# EAGLE board PCB-board-v1.1 (EAGLE 9.2.0)
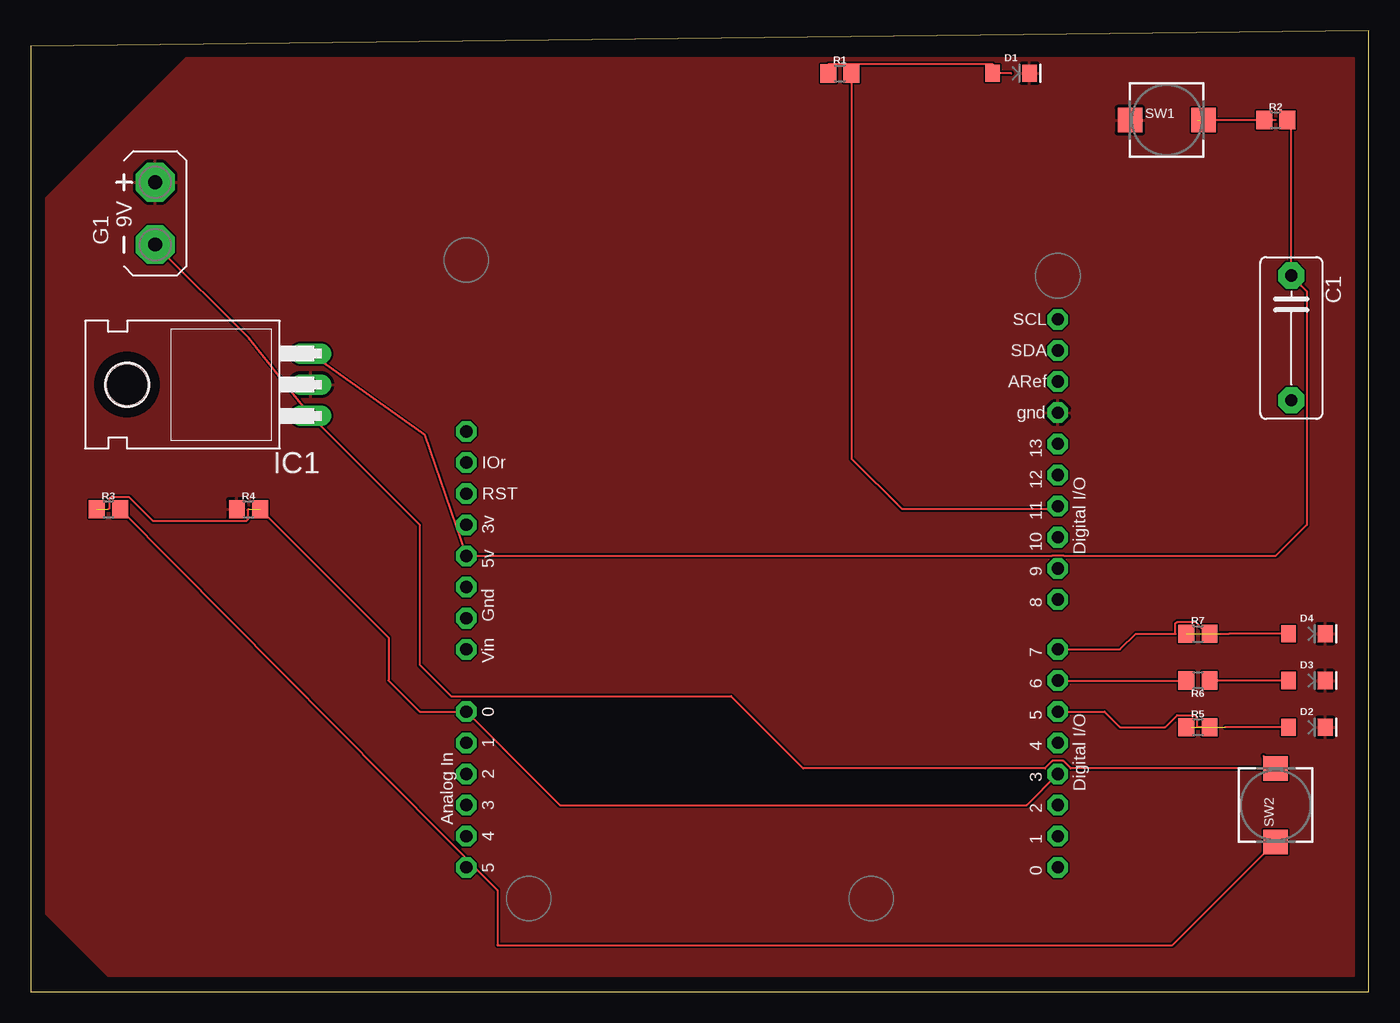
[diagram p0: board, top side]
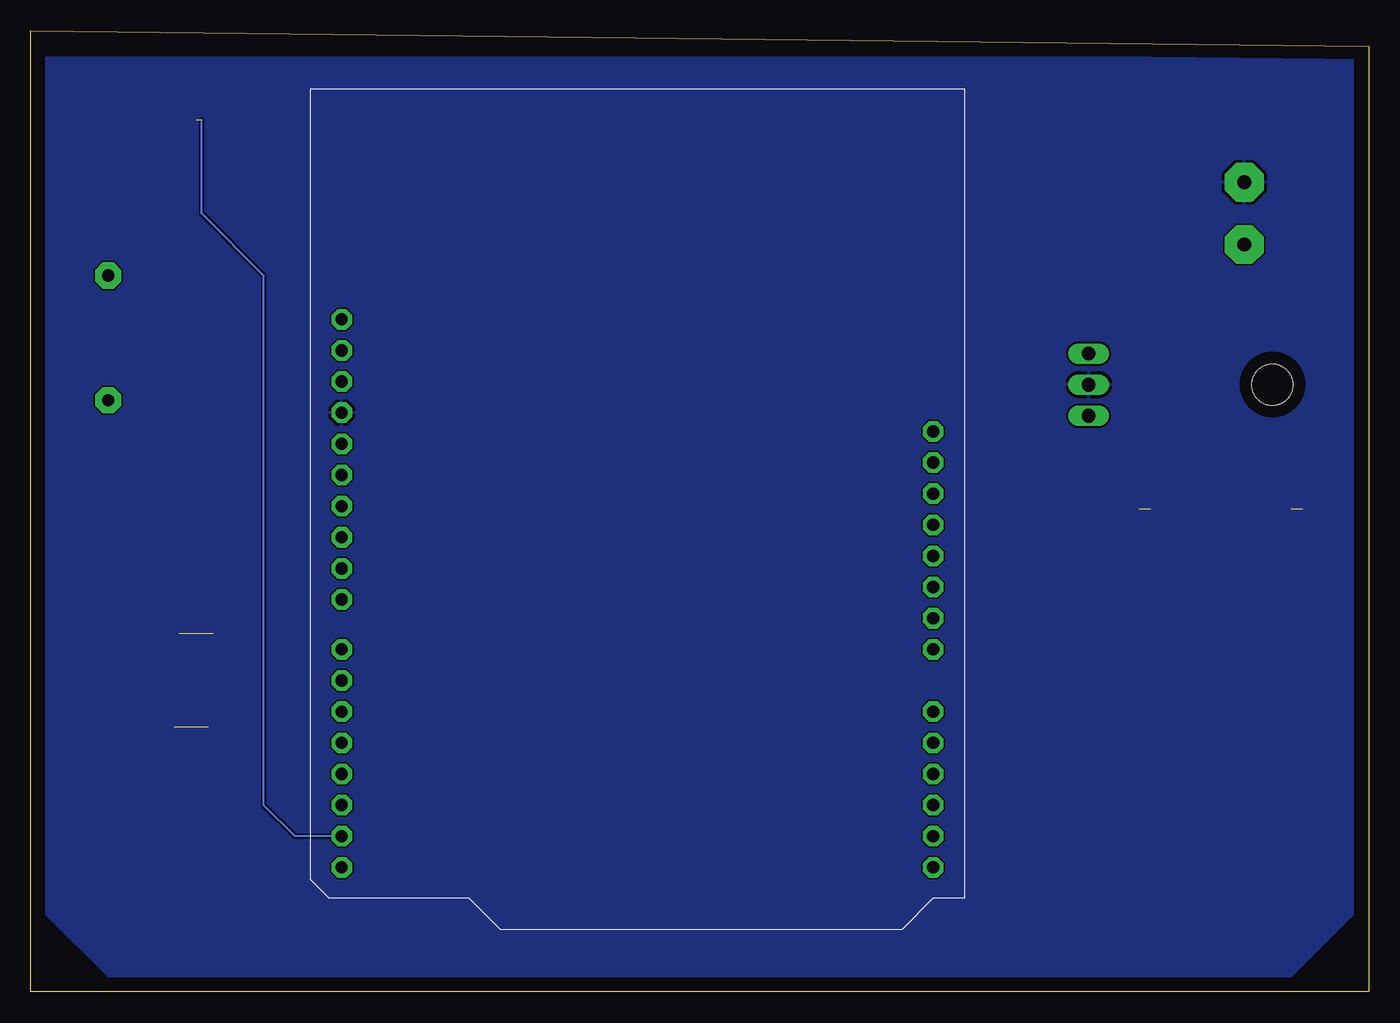
[diagram p1: board, bottom side, seen from below]

Size 109.2 x 78.41 mm. Coordinates in mm from the lower left corner, seen from the top.
Outline: 0,0 109.2,0 109.2,78.41 0,77.14 0,0
Copper layers (1*16): Top 0.035mm / dielectric 1.5mm / Bottom 0.035mm
Design rules "default": minimum track width 6mil, minimum drill 0.35mm, track to track 6mil, track to pad 6mil, pad to pad 6mil, via to via 6mil, smd to smd 6mil, copper to edge 40mil, drill to drill 6mil, minimum pad ring 10mil, minimum via ring 8mil, stop-mask expansion 4mil, vias tented up to drill 0mil, thermal gap 10mil

## Footprints (pad centres in the part's own frame; a part is rotated, then mirrored left to right if it is on the bottom)
C10B5 = drill 1.016 pad 2.159 octagon: 1 -5.08,0; 2 5.08,0
LED-1206 = smd 1.2 x 1.4: A -1.5,0; C 1.5,0
AB9V = drill 1.118 pad 3.15 octagon: + 0,2.54; - 0,-2.54
TO220H = drill 1.118 long: 1 -2.54,-10.16; 2 0,-10.16; 3 2.54,-10.16 | hole 3.302: 0,4.826
R0805 = smd 1.3 x 1.5: 1 -0.95,0; 2 0.95,0
PUSHBUTTON_SMD_SJ = smd 2 x 2: P$1 3,0; P$2 -3,0
ARDUINOR3-BPLACE = drill 1 pad 1.676 octagon: 3V 35.56,2.54; 5V 38.1,2.54; A0 50.8,2.54; A1 53.34,2.54; A2 55.88,2.54; A3 58.42,2.54; A4 60.96,2.54; A5 63.5,2.54; AREF 23.876,50.8; D0 63.5,50.8; D1 60.96,50.8; D2 58.42,50.8; D3 55.88,50.8; D4 53.34,50.8; D5 50.8,50.8; D6 48.26,50.8; D7 45.72,50.8; D8 41.656,50.8; D9 39.116,50.8; D10 36.576,50.8; D11 34.036,50.8; D12 31.496,50.8; D13 28.956,50.8; GND 26.416,50.8; GND1 43.18,2.54; GND2 40.64,2.54; IOREF 30.48,2.54; RESERVED 27.94,2.54; RESET 33.02,2.54; SCL 18.796,50.8; SDA 21.336,50.8; VIN 45.72,2.54

## Placement (x,y rotation side)
C1  [C10B5]  102.87,53.34 270 top
D1  BLUE  [LED-1206]  80.01,74.93 0 top
D2  BLUE  [LED-1206]  104.14,21.59 0 top
D3  BLUE  [LED-1206]  104.14,25.4 0 top
D4  BLUE  [LED-1206]  104.14,29.21 0 top
G1  AB9V  [AB9V]  10.16,63.5 0 top
IC1  7805T  [TO220H]  12.7,49.53 90 top
R1  10k  [R0805]  66.04,74.93 0 top
R2  10k  [R0805]  101.6,71.12 0 top
R3  10k  [R0805]  6.35,39.37 0 top
R4  10k  [R0805]  17.78,39.37 0 top
R5  10k  [R0805]  95.25,21.59 0 top
R6  10k  [R0805]  95.25,25.4 180 top
R7  10k  [R0805]  95.25,29.21 0 top
SW1  [PUSHBUTTON_SMD_SJ]  92.71,71.12 0 top
SW2  [PUSHBUTTON_SMD_SJ]  101.6,15.24 90 top
U1  ARDUINOR3-BPLACE  [ARDUINOR3-BPLACE]  33.02,73.66 270 top

## Library data of the parts
C1 = capacitor-wima
D1-D4 = SparkFun-LED; PROD_ID: DIO-09911
G1 = battery
IC1 SW1 SW2 U1 = adafruit
R1-R7 = rcl; SPICEPREFIX: R

## Nets
3V: U1.3V
GND: D1.C D2.C D3.C D4.C G1.+ IC1.2 R4.1 SW1.P$2 U1.GND
GND1: U1.GND1
GND2: U1.GND2
N$1: G1.- IC1.1 SW2.P$1
N$2: R1.2 U1.D11
N$3: D1.A R1.1
N$5: R2.1 SW1.P$1 U1.D1
N$6: R3.2 SW2.P$2
N$7: D2.A R5.1
N$8: R5.2 U1.D5
N$9: D3.A R6.1
N$10: R6.2 U1.D6
N$11: R7.2 U1.D7
N$12: D4.A R7.1
N$13: R3.1 R4.2 U1.A0 U1.D3
VCC: C1.1 IC1.3 R2.2 U1.5V
VIN: U1.VIN

## Tracks (layer width: path | path; a pad name or v marks a point on that pad's centre or on a via)
GND
  pour Top: 1.27,64.77 12.7,76.2 107.95,76.2 107.95,1.27 6.35,1.27 1.27,6.35
  pour Bottom: 1.27,76.2 107.95,76.2 107.95,6.35 102.87,1.27 6.35,1.27 1.27,6.35
N$1
  Top 0.152: G1.- 17.78,53.34 IC1.1 31.75,38.1 31.75,26.67 34.29,24.13 57.15,24.13 63.04,18.24 82.77,18.24 83.38,18.85 84.26,18.85 84.87,18.24 SW2.P$1 100.59,19.25
N$2
  Top 0.152: R1.2 66.99,43.5 71.12,39.37 83.82,39.37 U1.D11
N$3
  Top 0.152: R1.1 65.09,75.66 78.51,75.66 D1.A 80.01,74.93
N$5  (1 unrouted)
  Top 0.152: SW1.P$1 R2.1 101.6,71.12
  Bottom 0.152: U1.D1 87.63,12.7 90.17,15.24 90.17,58.42 95.25,63.5 95.25,71.12
N$6
  Top 0.152: R3.2 38.1,8.28 38.1,3.81 93.17,3.81 SW2.P$2
N$7  (1 unrouted)
  Top 0.152: D2.A 97.47,21.59 | 94.73,21.59 R5.1
N$8
  Top 0.152: 95.18,22.18 95.05,22.32 | 95.18,22.18 95.18,21.66 95.25,21.59 R5.2 | U1.D5 87.63,22.86 88.9,21.59 92.58,21.59 93.56,22.57 95.05,22.57 95.18,22.43 95.18,22.18
N$9
  Top 0.152: D3.A R6.1
N$10
  Top 0.152: U1.D6 R6.2
N$11
  Top 0.152: U1.D7 88.9,27.94 90.17,29.21 93.42,29.21 93.42,30.05 93.56,30.19 95.05,30.19 96.02,29.21 R7.2
N$12  (1 unrouted)
  Top 0.152: D4.A 97.79,29.21 | 97.08,29.21 97.79,29.21 | 97.79,29.21
N$13  (2 unrouted)
  Top 0.152: 17.78,39.37 17.71,39.3 17.71,38.52 17.57,38.39 10,38.39 8.04,40.35 6.55,40.35 6.42,40.22 6.42,39.44 6.35,39.37 | U1.D3 81.28,15.24 43.18,15.24 U1.A0 31.75,22.86 29.21,25.4 29.21,28.89 R4.2
VCC
  Top 0.152: IC1.3 32.18,45.41 U1.5V 83.33,35.56 83.38,35.61 84.26,35.61 84.31,35.56 101.6,35.56 104.14,38.1 104.14,57.15 C1.1 102.87,70.8 R2.2